# Altium PCB MBC PCB.PcbDoc
Units mm, origin at the board's own origin, x right, y up, seen from the top; angles counter-clockwise.
Board outline 68 x 68 mm, 2 copper layers (Top Layer, Bottom Layer); 66 components, 47 nets, 186 pads, 57 vias.
Unrouted connection lines stored in the file: 76.
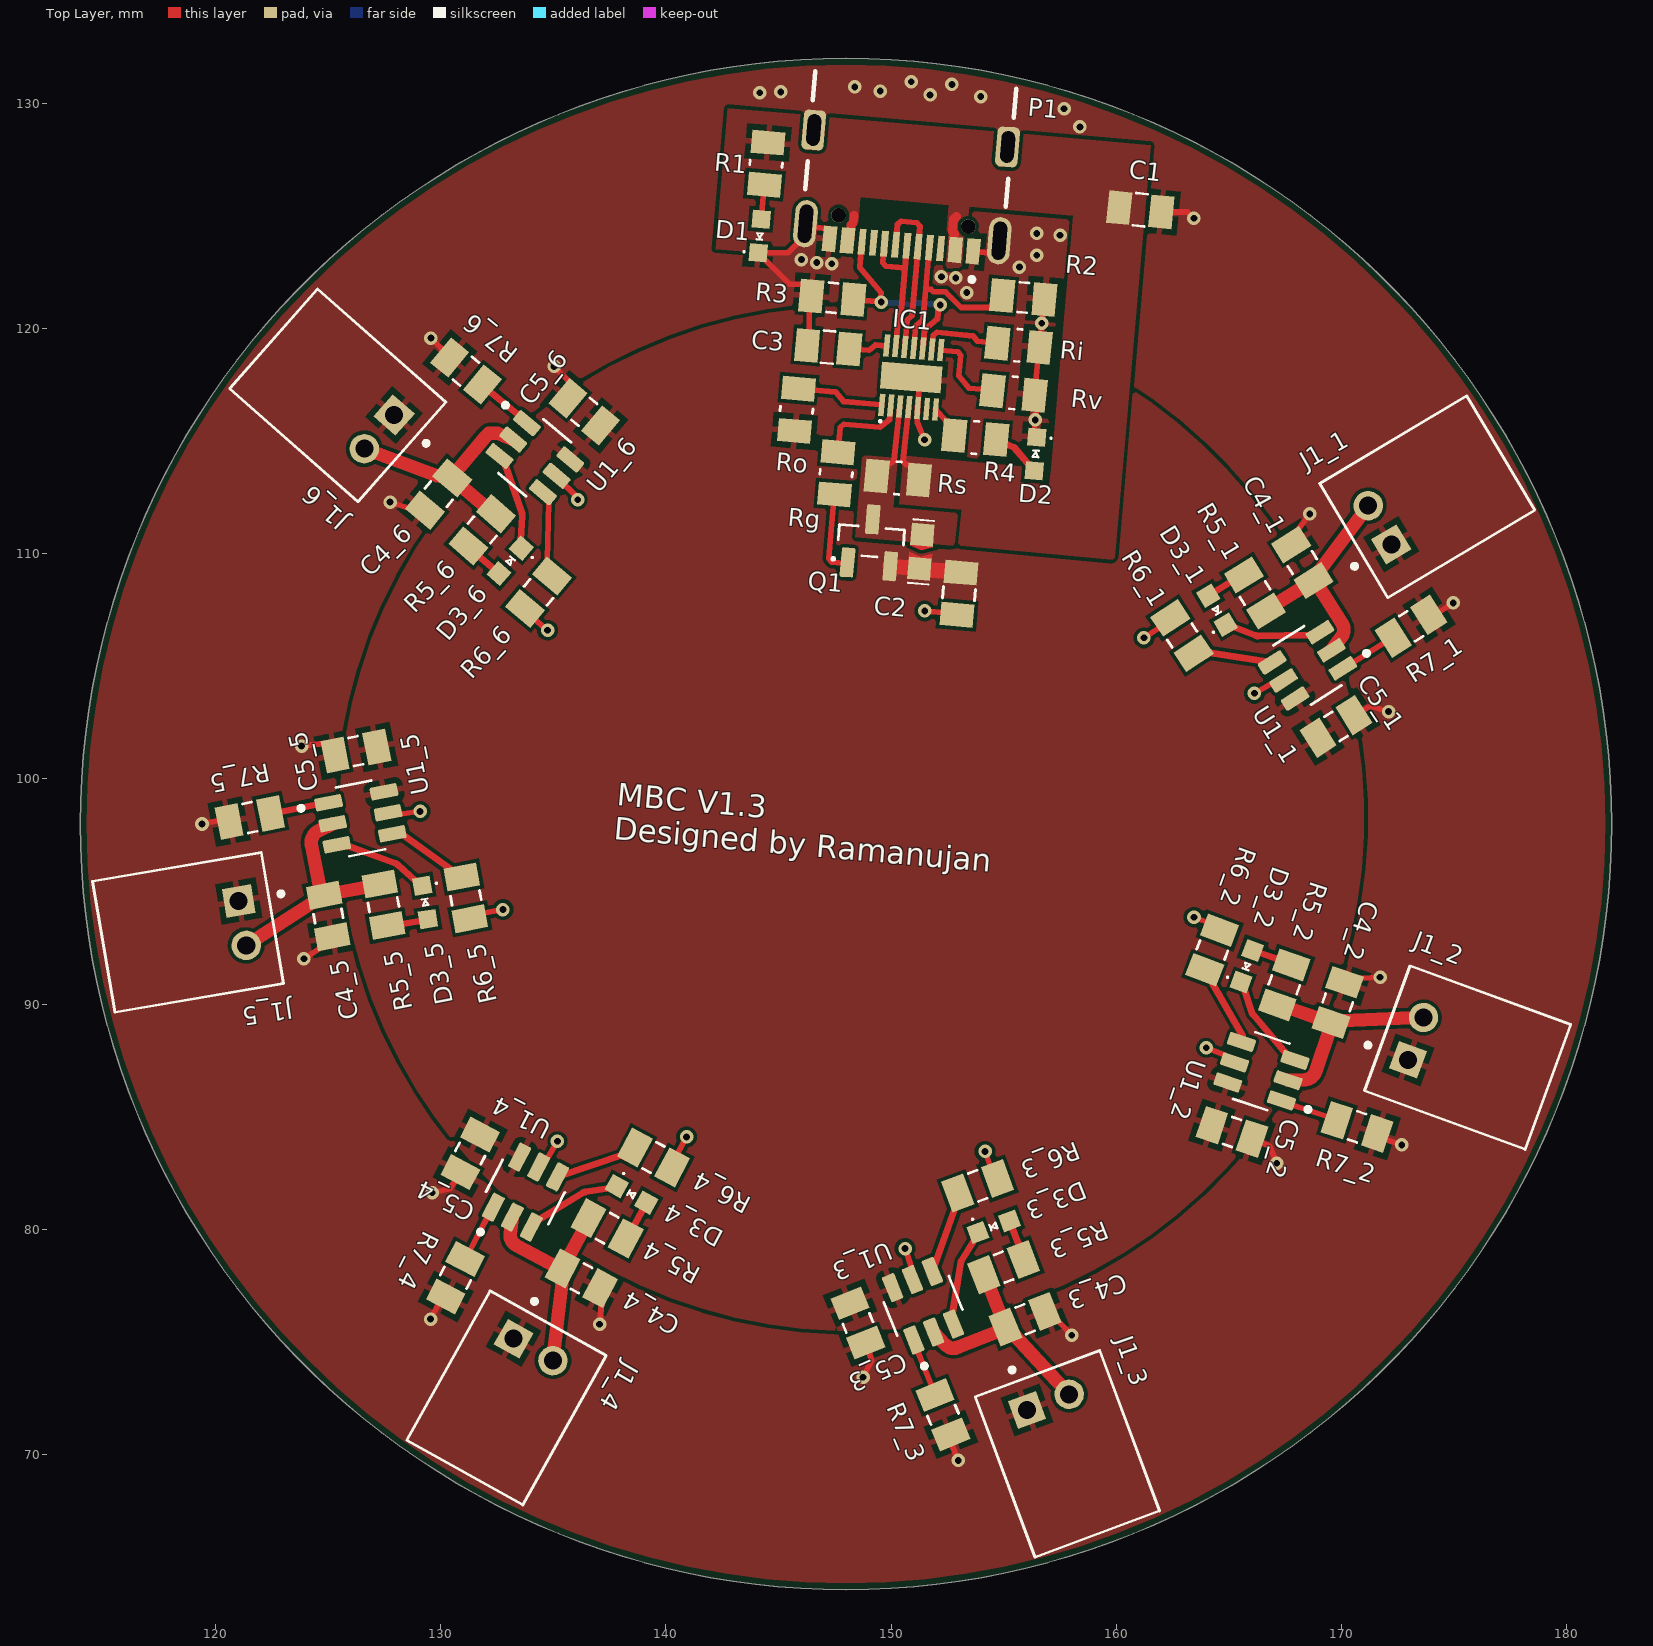
[diagram p0: Top Layer view]
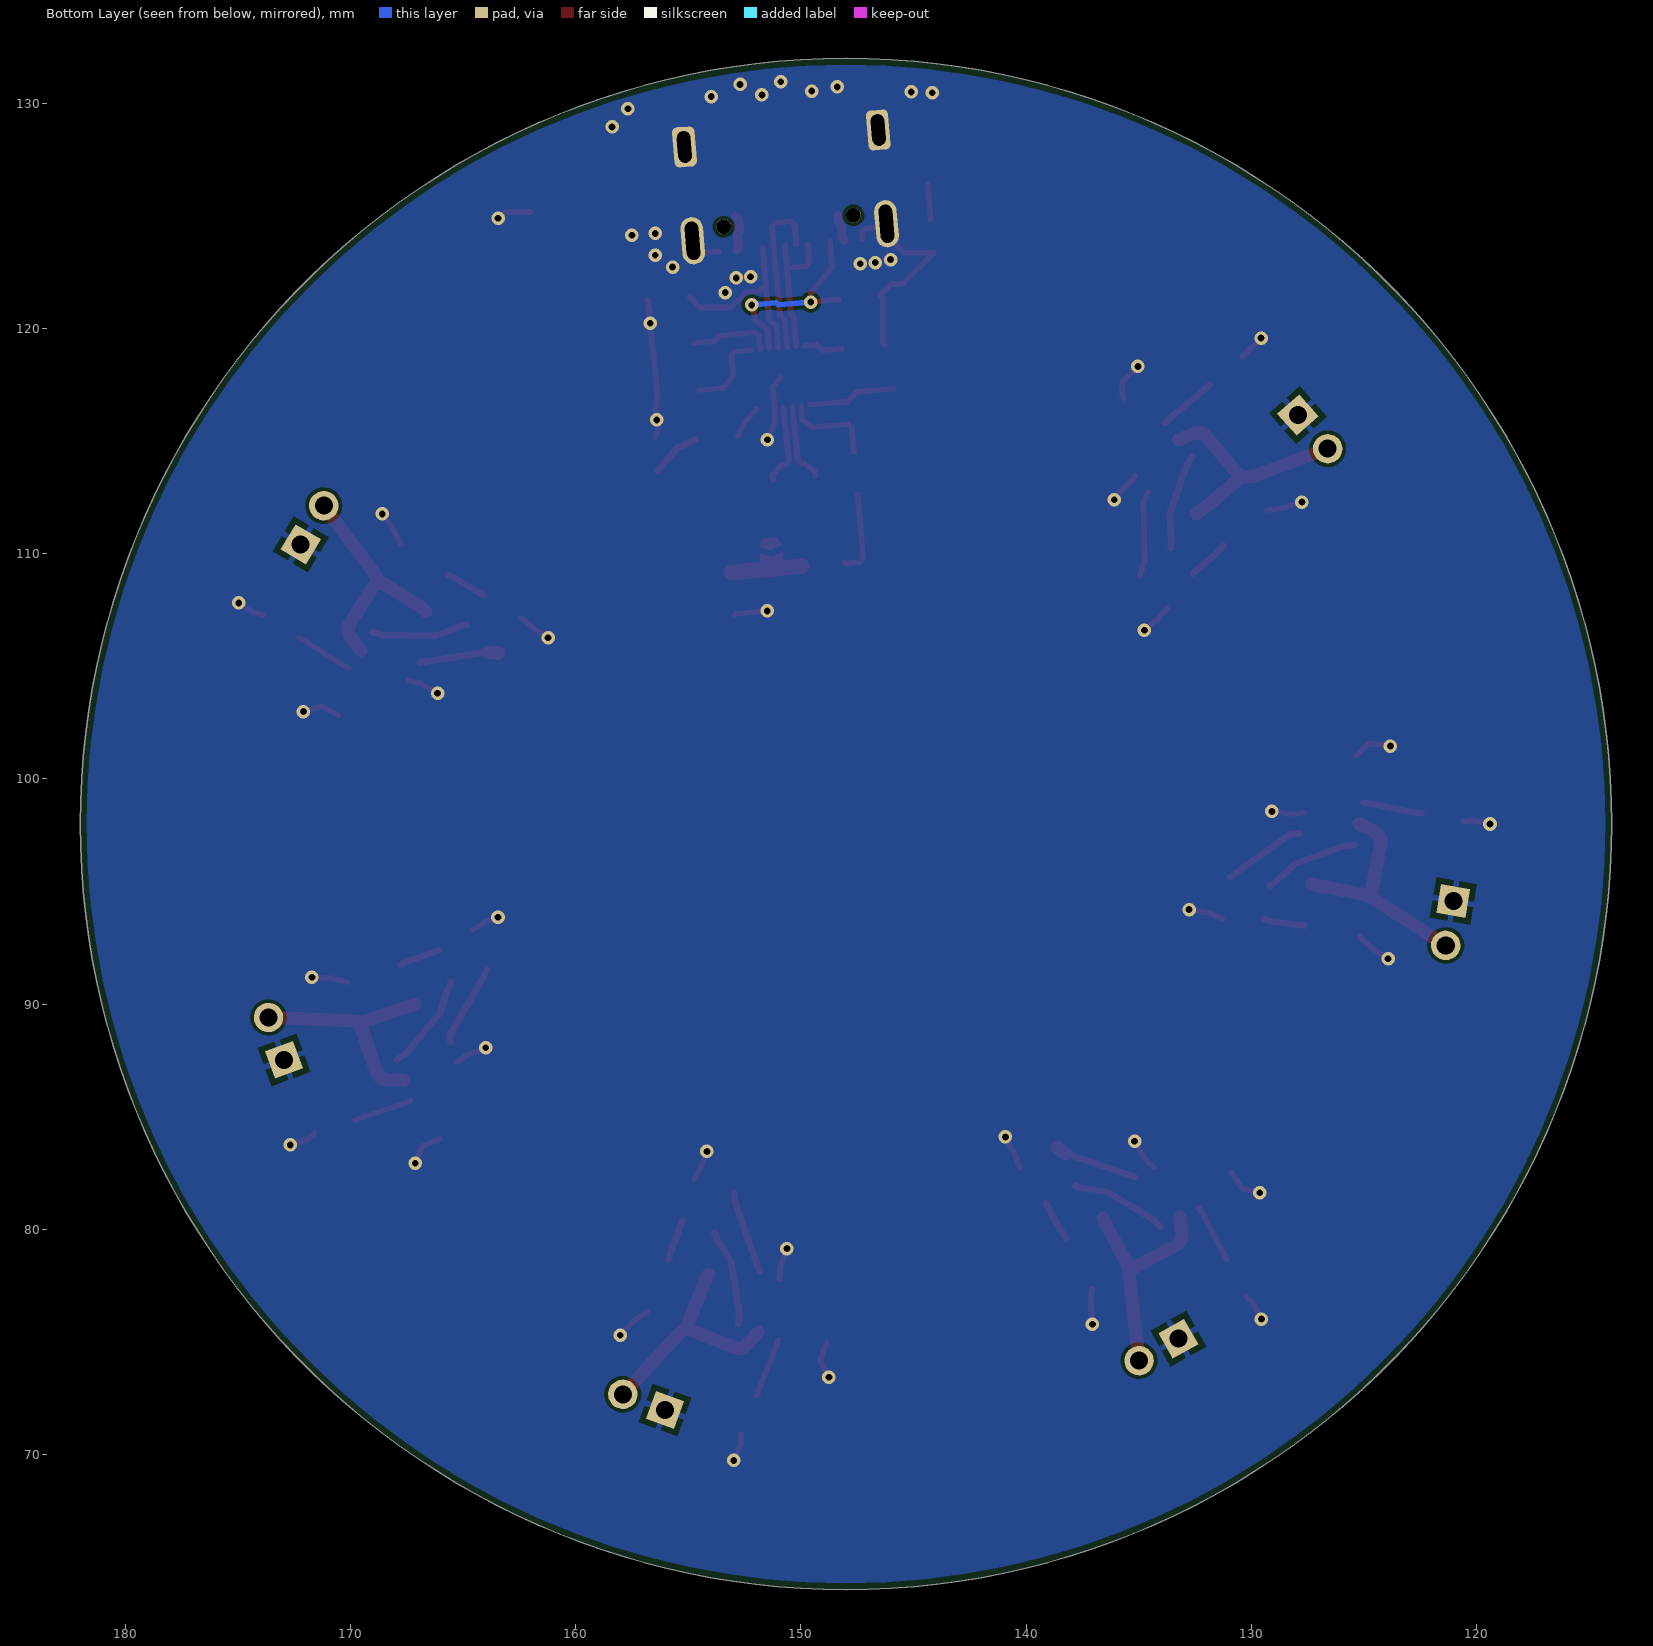
[diagram p1: Bottom Layer view, seen from below]
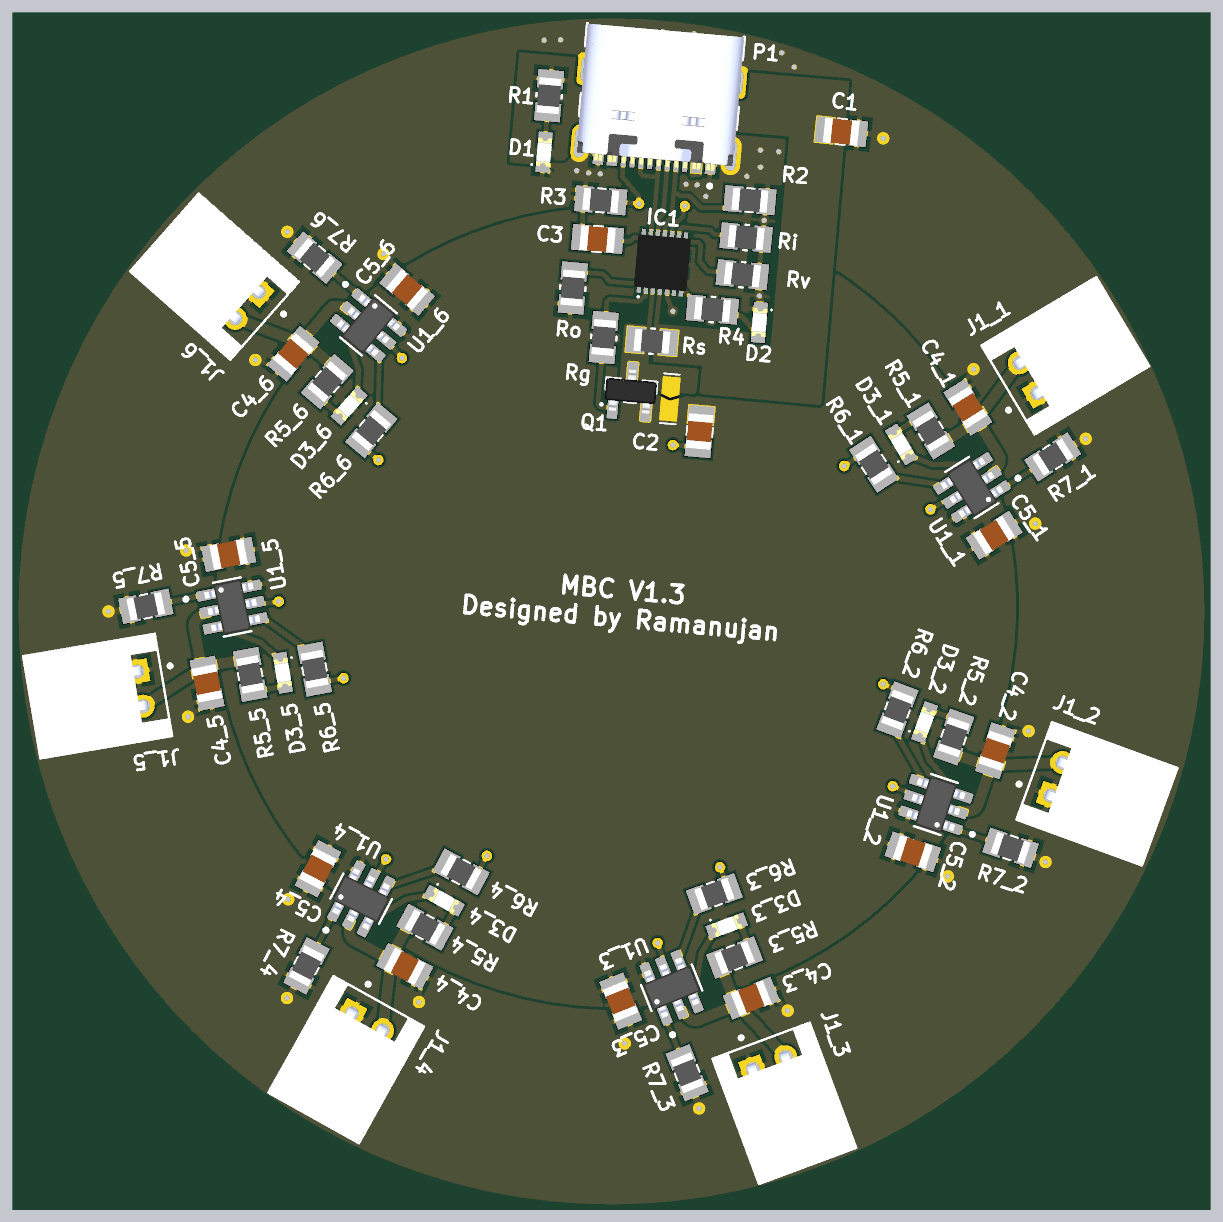
[diagram p2: 3D render of the assembled board from above, using the file's embedded part models]

## Layer stack, top to bottom
Top Solder: solder mask 0.0102, Solder Resist, Dk 3.5
Top Layer: signal copper 0.0356
Dielectric 1: dielectric 0.32, FR-4, Dk 4.8
Bottom Layer: signal copper 0.0356
Bottom Solder: solder mask 0.0102, Solder Resist, Dk 3.5

## Board outline
114,98 ccw(c148,98) 148,64 ccw(c148,98) 182,98 ccw(c148,98) 148,132 ccw(c148,98)

## Design rules (kind name [scope] priority, off if disabled: settings)
BoardOutlineClearance [All] p1: gap=0 ignorepadtopadclearanceinfootprint=FALSE
Clearance [All] p1: gap=0.152 ignorepadtopadclearanceinfootprint=FALSE except(0.127: Arc-Arc Arc-Track Arc-SMDPad Track-Track Track-SMDPad)
HoleSize [All] p1: absolutevalues=TRUE maxlimit=6.2 minlimit=0.3 maxpercent=80.000 minpercent=20.000
MinimumAnnularRing [All] p1: minimumring=0.15
MinimumSolderMaskSliver [All] p1: minsoldermaskwidth=0.1
PolygonConnect ViaConnect [IsVia] p1: connectstyle=Direct reliefconductorwidth=0.254 reliefentries=4 polygonreliefangle="90 Angle" airgapwidth=0.254
PolygonConnect [All] p2: connectstyle=Relief reliefconductorwidth=0.254 reliefentries=4 polygonreliefangle="90 Angle" airgapwidth=0.254
RoomDefinition 1 [InComponentClass('1')] p1: confinementstyle=ConfineIn formatcopy=TRUE lockcomponents=FALSE outline 160.777,107.336 167.902,113.062 175.749,117.735 179.309,111.757 172.116,102.324 168.754,100.205 162.957,104.013
RoomDefinition 2 [InComponentClass('2')] p2: confinementstyle=ConfineIn formatcopy=TRUE lockcomponents=FALSE outline 162.381,90.986 163.783,94.705 172.286,92.543 180.865,89.41 178.478,82.874 166.621,82.494 162.855,83.763
RoomDefinition 6 [InComponentClass('6')] p3: confinementstyle=ConfineIn formatcopy=TRUE lockcomponents=FALSE outline 119.884,117.29 124.487,122.509 135.668,118.545 138.714,115.992 136.584,109.011 134.042,105.956 126.734,111.249
RoomDefinition 5 [InComponentClass('5')] p4: confinementstyle=ConfineIn formatcopy=TRUE lockcomponents=FALSE outline 113.931,95.888 124.041,102.094 127.941,102.859 131.981,96.907 132.73,93.005 124.101,90.559 115.098,89.028
RoomDefinition 3 [InComponentClass('3')] p5: confinementstyle=ConfineIn formatcopy=TRUE lockcomponents=FALSE outline 146.615,77.219 151.549,82.432 155.28,83.8 159.416,75.744 162.601,67.185 156.08,64.758 148.095,73.531
RoomDefinition 4 [InComponentClass('4')] p6: confinementstyle=ConfineIn formatcopy=TRUE lockcomponents=FALSE outline 127.771,70.429 129.27,82.197 131.118,85.715 138.294,85.241 141.797,83.366 138.297,75.015 133.847,67.039
RoutingVias [All] p1: holewidth=0.3 width=0.6 viastyle="Through Hole" minholewidth=0.3 minwidth=0.5 maxholewidth=1 maxwidth=5
SilkToSilkClearance [All] p1: silktosilkclearance=0.1
SilkToSolderMaskClearance [IsPad] p1: minsilkscreentomaskgap=0.1 clearancetoexposedcopper=TRUE
SolderMaskExpansion [All] p1: expansion=0.051 istentingtop=FALSE
SupplyNets "Schematic Supply Nets" [InNet('GND')] p1: voltage=0.000
Width [All] p1: maxlimit=25.4 minlimit=0.15 preferedwidth=0.3
26 further rules are at their usual default settings.

## Classes and differential pairs
channel class Charger: 1 2 3 4 5 6
component class 6: C4_6 C5_6 D3_6 J1_6 R5_6 R6_6 R7_6 U1_6
component class 5: C4_5 C5_5 D3_5 J1_5 R5_5 R6_5 R7_5 U1_5
component class 4: C4_4 C5_4 D3_4 J1_4 R5_4 R6_4 R7_4 U1_4
component class 3: C4_3 C5_3 D3_3 J1_3 R5_3 R6_3 R7_3 U1_3
component class 2: C4_2 C5_2 D3_2 J1_2 R5_2 R6_2 R7_2 U1_2
component class 1: C4_1 C5_1 D3_1 J1_1 R5_1 R6_1 R7_1 U1_1
component class Main: C1 C2 C3 D1 D2 IC1 P1 Q1 R1 R2 R3 R4 Rg Ri Ro Rs Rv

## Components (designator, comment, footprint, x,y, rotation, side; value= is the part's Value field where it differs from the comment)
C1 "10uF" CAPACITOR_0805_2012M-70N 161.069,125.279 r174 top
C2 "10uF" CAPACITOR_0805_2012M-70N 153.018,108.23 r85 top
C3 "1uF" CAPACITOR_0805_2012M-70N 147.21,119.178 r355 top
C4_1 "2.2uF" CAPACITOR_0805_2012M-70N 168.266,109.607 r302.07 top (schematic designator C4)
C4_2 "2.2uF" CAPACITOR_0805_2012M-70N 169.837,90.078 r251.23 top (schematic designator C4)
C4_3 "2.2uF" CAPACITOR_0805_2012M-70N 155.951,76.008 r201.7 top (schematic designator C4)
C4_4 "2.2uF" CAPACITOR_0805_2012M-70N 136.25,77.823 r152.13 top (schematic designator C4)
C4_5 "2.2uF" CAPACITOR_0805_2012M-70N 125.007,93.914 r100.94 top (schematic designator C4)
C4_6 "2.2uF" CAPACITOR_0805_2012M-70N 129.912,112.653 r49.88 top (schematic designator C4)
C5_1 "2.2uF" CAPACITOR_0805_2012M-70N 169.762,102.332 r212.22 top (schematic designator C5)
C5_2 "2.2uF" CAPACITOR_0805_2012M-70N 165.141,84.324 r161.39 top (schematic designator C5)
C5_3 "2.2uF" CAPACITOR_0805_2012M-70N 148.526,75.845 r111.86 top (schematic designator C5)
C5_4 "2.2uF" CAPACITOR_0805_2012M-70N 131.312,83.37 r62.29 top (schematic designator C5)
C5_5 "2.2uF" CAPACITOR_0805_2012M-70N 126.234,101.238 r11.09 top (schematic designator C5)
C5_6 "2.2uF" CAPACITOR_0805_2012M-70N 136.381,116.302 r320.03 top (schematic designator C5)
D1 "LTST-C190 Series" LED_0603_1608M_0.80mm 144.168,124.112 r85 top
D2 "LTST-C190 Series" LED_0603_1608M_0.80mm 156.412,114.43 r265.43 top
D3_1 "LTST-C190 Series" LED_0603_1608M_0.80mm 164.472,107.495 r120.65 top (schematic designator D3)
D3_2 "LTST-C190 Series" LED_0603_1608M_0.80mm 165.803,91.686 r69.81 top (schematic designator D3)
D3_3 "LTST-C190 Series" LED_0603_1608M_0.80mm 154.556,80.12 r20.28 top (schematic designator D3)
D3_4 "LTST-C190 Series" LED_0603_1608M_0.80mm 138.476,81.552 r330.71 top (schematic designator D3)
D3_5 "LTST-C190 Series" LED_0603_1608M_0.80mm 129.308,94.516 r279.52 top (schematic designator D3)
D3_6 "LTST-C190 Series" LED_0603_1608M_0.80mm 133.083,109.686 r228.46 top (schematic designator D3)
IC1 "AP33771CFBZ-13-FA01" AP33771CFBZ13FA01 150.896,117.829 r355 top
J1_1 "S2B-PH-K-S(LF)(SN)" JST_S2B-PH-K-S(LF)(SN) 171.704,111.277 r120.78 top (schematic designator J1)
J1_2 "S2B-PH-K-S(LF)(SN)" JST_S2B-PH-K-S(LF)(SN) 173.304,88.467 r69.94 top (schematic designator J1)
J1_3 "S2B-PH-K-S(LF)(SN)" JST_S2B-PH-K-S(LF)(SN) 156.976,72.325 r20.41 top (schematic designator J1)
J1_4 "S2B-PH-K-S(LF)(SN)" JST_S2B-PH-K-S(LF)(SN) 134.112,74.654 r330.84 top (schematic designator J1)
J1_5 "S2B-PH-K-S(LF)(SN)" JST_S2B-PH-K-S(LF)(SN) 121.198,93.594 r279.65 top (schematic designator J1)
J1_6 "S2B-PH-K-S(LF)(SN)" JST_S2B-PH-K-S(LF)(SN) 127.27,115.415 r228.59 top (schematic designator J1)
P1 "USB4105-GF-A" GCT_USB4105-GF-A 150.871,128.444 r175 top
Q1 "AS2312" SOT23-3N-1.15mm 149.103,110.53 r85 top
R1 "100k" Resistor_0805_2012M-50N 144.453,127.325 r85 top
R2 "5.1k" Resistor_0805_2012M-50N 155.875,121.381 r175 top
R3 "5.1k" Resistor_0805_2012M-50N 147.391,121.371 r355 top
R4 "1k" Resistor_0805_2012M-50N 153.739,115.162 r174.81 top
R5_1 "1.5k" Resistor_0805_2012M-50N 166.162,108.256 r301.49 top (schematic designator R5)
R5_2 "1.5k" Resistor_0805_2012M-50N 167.461,90.856 r250.66 top (schematic designator R5)
R5_3 "1.5k" Resistor_0805_2012M-50N 155.001,78.32 r201.13 top (schematic designator R5)
R5_4 "1.5k" Resistor_0805_2012M-50N 137.394,80.046 r151.56 top (schematic designator R5)
R5_5 "1.5k" Resistor_0805_2012M-50N 127.456,94.415 r100.37 top (schematic designator R5)
R5_6 "1.5k" Resistor_0805_2012M-50N 131.842,111.063 r49.3 top (schematic designator R5)
R6_1 "560" Resistor_0805_2012M-50N 162.922,106.367 r303.26 top (schematic designator R6)
R6_2 "560" Resistor_0805_2012M-50N 164.263,92.4 r249.34 top (schematic designator R6)
R6_3 "560" Resistor_0805_2012M-50N 153.849,81.931 r200.14 top (schematic designator R6)
R6_4 "560" Resistor_0805_2012M-50N 139.45,83.191 r151.85 top (schematic designator R6)
R6_5 "560" Resistor_0805_2012M-50N 131.116,94.718 r100.86 top (schematic designator R6)
R6_6 "560" Resistor_0805_2012M-50N 134.343,108.291 r50.24 top (schematic designator R6)
R7_1 "10k" Resistor_0805_2012M-50N 173.093,106.783 r212.52 top (schematic designator R7)
R7_2 "10k" Resistor_0805_2012M-50N 170.696,84.552 r161.68 top (schematic designator R7)
R7_3 "10k" Resistor_0805_2012M-50N 152.305,71.767 r112.16 top (schematic designator R7)
R7_4 "10k" Resistor_0805_2012M-50N 130.658,77.849 r62.59 top (schematic designator R7)
R7_5 "10k" Resistor_0805_2012M-50N 121.522,98.288 r11.39 top (schematic designator R7)
R7_6 "10k" Resistor_0805_2012M-50N 131.124,118.112 r320.33 top (schematic designator R7)
Rg "6.2k" Resistor_0805_2012M-50N 147.563,113.576 r265 top
Ri "5.1k" Resistor_0805_2012M-50N 155.659,119.258 r174.34 top (schematic designator Risel)
Ro "200" Resistor_0805_2012M-50N 145.801,116.39 r265 top
Rs "5mOhm" Resistor_0805_2012M-50N 150.305,113.363 r175 top
Rv "100k" Resistor_0805_2012M-50N 155.443,117.146 r173.89 top (schematic designator Rvsel)
SB1 "Solder Jumper Normally Open" "Solder bridge Chevron 0603 Open" 151.323,110.085 r265 top
U1_1 "BQ21040DBVR" SOT95P280X145-6N 168.497,105.045 r212.36 top (schematic designator U1)
U1_2 "BQ21040DBVR" SOT95P280X145-6N 166.446,87.018 r161.52 top (schematic designator U1)
U1_3 "BQ21040DBVR" SOT95P280X145-6N 151.422,76.601 r111.99 top (schematic designator U1)
U1_4 "BQ21040DBVR" SOT95P280X145-6N 133.765,81.655 r62.42 top (schematic designator U1)
U1_5 "BQ21040DBVR" SOT95P280X145-6N 126.436,98.252 r11.23 top (schematic designator U1)
U1_6 "BQ21040DBVR" SOT95P280X145-6N 134.184,114.268 r320.17 top (schematic designator U1)

## Footprints (in the part's own frame and the unit in brackets; to place one, negate y for a bottom-side part, rotate by r counter-clockwise, add the part's x,y. Pads: shape width x height; smd on the part's side, far side on the other; paste and mask are expansions set on the pad)
AP33771CFBZ13FA01 [mm]
  rect 0.24x1 smd mask+0.029: 1(-1.2,-1.325) 2(-0.8,-1.325) 3(-0.4,-1.325) 4(0,-1.325) 5(0.4,-1.325) 6(0.8,-1.325) 7(1.2,-1.325) 8(1.2,1.325) 9(0.8,1.325) 10(0.4,1.325) 11(0,1.325) 12(-0.4,1.325) 13(-0.8,1.325) 14(-1.2,1.325)
  rect 2.7x1.2 smd: 15(0,0)
  silkscreen extent -1.25,-2.1 -1.15,-2, body extent -1.5,-1.5 1.5,1.5, height 0.75
CAPACITOR_0805_2012M-70N [mm] "Capacitor, 0805 (2012 metric), 0.7mm high, nominal pads,"
  rect 1.04x1.47 smd mask+0.051: 1(-0.94,0) 2(0.94,0)
  silkscreen extent -0.25,-0.72 0.25,0.72, body extent -1,-0.73 1,0.73, height 1.23
GCT_USB4105-GF-A [mm]
  rect 0.6x1.15 smd mask+0.049: A1_B12(-3.2,4.755) A4_B9(-2.4,4.755) B1_A12(3.2,4.755) B4_A9(2.4,4.755)
  rect 0.3x1.15 smd mask+0.049: A5(-1.25,4.755) A6(-0.25,4.755) A7(0.25,4.755) A8(1.25,4.755) B5(1.75,4.755) B6(0.75,4.755) B7(-0.75,4.755) B8(-1.75,4.755)
  oval 1x2.1 hole 0.6 slot 1.7 at 90 deg: SH1(-4.32,4.18) SH2(4.32,4.18)
  rrect50% 1x1.8 hole 0.6 slot 1.4 at 90 deg: SH3(-4.32,0) SH4(4.32,0)
  round 0.65 hole 0.65 unplated mask+0.051: ""(-2.89,3.68) ""(2.89,3.68)
  silkscreen extent -4.47,-2.6 4.47,6.1, body extent -4.47,-2.6 4.47,5.11, height 3.31
JST_S2B-PH-K-S(LF)(SN) [mm]
  rect 1.308x1.308 / inner round 1.308 / far side rect 1.308x1.308 hole 0.8: 1(-1,0)
  round 1.308 hole 0.8: 2(1,0)
  silkscreen extent -2.95,-6.25 2.95,2, body extent -2.98,-6.21 2.92,1.39, height 4.8
LED_0603_1608M_0.80mm [mm] "LED, 0603 (1608 metric), 0.8mm high"
  rect 0.8x0.8 smd mask+0.051: A(0.75,0) C(-0.75,0)
  silkscreen extent -0.79,-0.12 0.13,0.66, body extent -0.8,-0.4 0.8,0.4, height 0.8
Resistor_0805_2012M-50N [mm] "Resistor, 0805 (2012 metric), nominal pads"
  rect 1.04x1.47 smd mask+0.051: 1(-0.94,0) 2(0.94,0)
  silkscreen extent -0.1,-0.72 0.1,0.72, body extent -1,-0.63 1,0.62, height 0.5
"Solder bridge Chevron 0603 Open" [mm] "Solder bridge for robust, easy to access bridges that are likely to be soldered and unsoldered often. Open."
  rect 1x1.02 smd paste-2539.97 mask+0: 1(-0.759,0) 2(0.759,0)
  Top Layer region: 0.677,-0.51 0.677,0 0.227,0 0.033,-0.51
  Top Layer region: 0.677,0.51 0.677,0 0.227,0 0.033,0.51
  Top Layer region: -0.631,-0.296 -0.631,0.304 -0.26,0.51 -0.065,0.004 -0.26,-0.506
  silkscreen extent -1.41,-0.45 1.41,0.45
SOT23-3N-1.15mm [mm] "SOT23, 3-pin, 1.15mm high, nominal pads"
  rrect25% 1.32x0.6 smd mask+0.051: 1(-1,0.95) 2(-1,-0.95) 3(1,0)
  silkscreen extent -0.93,-1.45 0.65,1.63, body extent -1.19,-1.45 1.21,1.45, height 0.91
SOT95P280X145-6N [mm]
  rrect25% 1.21x0.58 smd: 1(-1.255,0.95) 2(-1.255,0) 3(-1.255,-0.95) 4(1.255,-0.95) 5(1.255,0) 6(1.255,0.95)
  silkscreen extent -2.6,-1.56 0.8,1.56, body extent -1.4,-1.45 1.4,1.45, height 1.45

## Part data
C1 C2 C3: library part GRM21BR60J107ME15L, "Passive - Capacitor, 0805, 100uF Max, X5R, 6.3V ±20%, -55°C ~ 85°C, 0805 (2012 Metric). 20uF @ 6.3V", Capacitance at Rated Voltage=20%, Package=0805, Rated Voltage=6.3V, Supplier 1 Part No.=490-GRM155R61E225KE11JCT-ND, Temp Range="-55°C ~ 85°C", Temperature Coefficient=X5R, Tolerance=±20%, APSS Standard Part="APSS Standard", MF Part No.=GRM21BR60J107ME15L, Supplier 1=Digikey
C4_1 C4_2 C4_3 C4_4 C4_5 C4_6 C5_1 C5_2 C5_3 C5_4 C5_5 C5_6: library part C0805C225K8PACTU, "Passive - Capacitor, X5R, 2.2uF Max, 10V, 0805 (2012 Metric), ±10%, -55°C ~ 85°C. 2uF @ 5V, 1.1uF @ 10V", Capacitance at Rated Voltage=50%, Package=0805, Rated Voltage=10V, Supplier 1 Part No.=399-C0805C225K8PACTUCT-ND, Temp Range="-55°C ~ 85°C", Temperature Coefficient=X5R, Tolerance=±10%, APSS Standard Part="APSS Standard", MF Part No.=C0805C225K8PACTU, Supplier 1=Digikey
D1 D2 D3_1 D3_2 D3_3 D3_4 D3_5 D3_6: "Diode - LED, 0603", Package=0603, Rated Voltage="5V Reverse", Temp Range="-30°C ~ 85°C", APSS Standard Part="APSS Standard", Supplier 1=Digikey
IC1: "Integrated Circuit", Manufacturer_Name="Diodes Incorporated", Mouser Part Number=621-P33771CFBZ13FA01, Arrow Part Number=AP33771CFBZ-13-FA01, Arrow Price/Stock=https://www.arrow.com/en/products/ap33771cfbz-13-fa01/diodes-incorporated?utm_currency=USD&region=nac, Datasheet Link=https://www.diodes.com/datasheet/download/AP33771C.pdf, Height=0.8mm, Manufacturer_Part_Number=AP33771CFBZ-13-FA01, Mouser Price/Stock=https://www.mouser.co.uk/ProductDetail/Diodes-Incorporated/AP33771CFBZ-13-FA01?qs=2wMNvWM5ZX7JpCFGcPz6nw%3D%3D
J1_1 J1_2 J1_3 J1_4 J1_5 J1_6: "Connector Header Through Hole, Right Angle 2 position", Package=None, Availability="In Stock", Check_prices=https://www.snapeda.com/parts/S2B-PH-K-S(LF)(SN)/JST+Sales+America+Inc./view-part/?ref=eda, MF="JST Sales America Inc.", MP=S2B-PH-K-S(LF)(SN), Price=None, Purchase-URL=https://pricing.snapeda.com/search/part/S2B-PH-K-S(LF)(SN)/?ref=eda, SnapEDA_Link=https://www.snapeda.com/parts/S2B-PH-K-S(LF)(SN)/JST+Sales+America+Inc./view-part/?ref=snap
P1: "USB-C (USB TYPE-C) USB 2.0 Receptacle Connector 24 (16+8 Dummy) Position Surface Mount, Right Angle; Through Hole", Supplier 1 Part No.=2073-USB4105-GF-ACT-ND, MF Part No.=USB4105-GF-A, Supplier 1=Digikey
Q1: "Transistor - MOSFET, N-Channel AS2312", Package=SOT-23-3, Power=1.2W, Rated Voltage="20 Vds", Supplier 1 Part No.=4530-AS2312CT-ND, Temp Range="0°C ~ 150°C (TJ)", APSS Standard Part="APSS Standard", MF Part No.=AS2312, Supplier 1=Digikey
R1 R2 R3 R4 R5_1 R5_2 R5_3 R5_4 R5_5 R5_6 R6_1 R6_2 R6_3 R6_4 R6_5 R6_6 R7_1 R7_2 R7_3 R7_4 R7_5 R7_6 Rg Ri Ro Rs Rv: library part "RMCF0805JT Series", "Passive - Resistor Series, 0805, 5%, 100m - 22M, E24, 0.063W, 1/16W, ±200ppm/°C, -55°C ~ 155°C, 0805 (2012 Metric)", Package=0805, Power=1/8W, Rated Voltage=150V, Temp Range="-55°C ~ 155°C", Temperature Coefficient=±200ppm/°C, Tolerance=5%, Value Range="100m ~ 22M", APSS Standard Part="APSS Standard", E Series=E24, Supplier 1=Digikey
U1_1 U1_2 U1_3 U1_4 U1_5 U1_6: "1-cell, 0.8-A Li-ion and Li-polymer battery charger", Package=SOT23-6, Supplier 1 Part No.=296-47315-1-ND, MF="Texas Instruments", MF Part No.=BQ21040DBVR, Supplier 1=Digikey
SB1: DEBUG=DEBUG

## Via types
v1: diameter 0.6, hole 0.3, Top Layer to Bottom Layer, 34 vias
v2: diameter 0.6, hole 0.3, Top Layer to Bottom Layer, tented both sides, 23 vias

## Nets (pads, with @x,y where several pads share a name; then routed paths per layer and width w, separated by ;. In a path a pad name is that pad's centre, name@x,y a point inside that pad or via, vN(x,y) a via of type N, cw(c..) or ccw(c..) an arc to the next point about the centre after c; other vN are vias at no path point)
CC1: IC1.11 P1.A5 R2.2 | length 8.6
  Top Layer w0.254: IC1.11 151.096,120.117 151.421,120.39 151.541,121.76 ; P1.A5 151.541,121.76 ; R2.2 154.938,121.396 154.483,120.94 153.113,120.94 152.422,121.631 151.888,121.631 151.78,121.74 151.688,121.748 151.541,121.76
CC2: IC1.10 P1.B5 R3.2 | length 9.2
  Top Layer w0.254: R3.2 v1(149.568,121.18) 149.527,121.229 149.559,121.593 148.614,122.719 P1.B5 ; IC1.10 151.418,119.12 151.49,119.95 152.061,120.429 152.11,120.992 v1(152.182,121.052)
  Bottom Layer w0.254: v1(149.568,121.18) 150.995,121.055 151.103,121.146 v1(152.182,121.052)
DN: IC1.12 P1.A7 P1.B7 | length 7.5
  Top Layer w0.254: P1.A7 150.287,124.632 150.448,124.767 151.148,124.706 151.283,124.545 P1.B7 150.935,120.57 150.718,120.388 IC1.12
DP: IC1.13 P1.A6 P1.B6 | length 6.4
  Top Layer w0.254: P1.B6 149.636,122.931 149.772,122.768 150.619,122.694 ; IC1.13 150.332,120.561 150.44,120.652 150.619,122.694 ; P1.A6 150.619,122.694
GND: C1.1 C2.1 C3.1 C4_1.1 C4_2.1 C4_3.1 C4_4.1 C4_5.1 C4_6.1 C5_1.1 C5_2.1 C5_3.1 C5_4.1 C5_5.1 C5_6.1 D1.C D2.C IC1.5 IC1.15 J1_1.1 J1_2.1 J1_3.1 J1_4.1 J1_5.1 J1_6.1 P1.A1_B12 P1.B1_A12 P1.SH1 P1.SH2 P1.SH3 P1.SH4 R2.1 R3.1 R6_1.1 R6_2.1 R6_3.1 R6_4.1 R6_5.1 R6_6.1 R7_1.1 R7_2.1 R7_3.1 R7_4.1 R7_5.1 R7_6.1 Ri.1 Rv.1 U1_1.5 U1_2.5 U1_3.5 U1_4.5 U1_5.5 U1_6.5 | length 67.8
  Top Layer w0.254: v1(119.4,98) 120.189,98.159 R7_5.1 ; v1(123.819,101.463) 124.809,101.578 C5_5.1 ; v1(123.924,92.011) 124.663,92.49 C4_5.1 ; U1_5.5 128.168,98.429 v1(129.083,98.561) ; v1(127.752,112.299) 128.588,112.025 C4_6.1 ; v1(129.552,76.015) 129.922,76.729 R7_4.1 ; v1(129.567,119.582) 130.401,118.753 R7_6.1 ; v1(129.623,81.628) 130.417,81.809 C5_4.1 ; R6_5.1 131.867,94.029 v1(132.766,94.202) ; R6_6.1 134.148,107.105 v1(134.749,106.605) ; U1_4.5 134.712,83.116 v1(135.183,83.911) ; v1(135.037,118.321) 135.037,118.319 135.735,117.624 135.737,116.983 C5_6.1 ; U1_6.5 135.148,113.42 136.088,112.485 v1(136.088,112.403) ; v1(137.054,75.787) 137.144,76.662 C4_4.1 ; R6_4.1 140.5,83.319 v1(140.918,84.1) ; C3.1 146.364,119.351 146.364,121.362 R3.1 146.455,121.521 146,121.976 145.492,121.976 D1.C 145.411,123.365 146.203,124.157 P1.SH2 146.319,124.519 147.136,124.448 147.293,124.26 P1.B1_A12 ; v1(148.757,73.431) 149.134,74.153 C5_3.1 ; v1(150.624,79.144) 150.925,78.269 U1_3.5 ; IC1.15 151.26,117.395 IC1.5 151.16,115.963 151.16,115.861 151.169,115.838 v2(151.489,115.065) ; v1(151.495,107.46) 152.899,107.337 C2.1 ; R7_3.1 152.68,70.481 v1(152.984,69.736) ; P1.A1_B12 154.417,123.361 154.79,123.674 P1.SH1 ; v1(154.174,83.456) 154.419,82.788 R6_3.1 ; D2.C 156.357,115.46 156.461,116.425 Rv.1 156.428,117.652 156.518,118.562 Ri.1 156.647,119.771 156.728,120.696 R2.1 ; C4_3.1 157.414,75.936 v1(158.022,75.299) ; v1(161.23,106.267) 161.951,106.74 R6_1.1 ; C1.1 163.171,125.18 v1(163.453,124.898) ; v1(163.455,93.859) 164.075,93.625 R6_2.1 ; v1(163.994,88.062) 164.854,87.722 U1_2.5 ; C5_2.1 166.823,83.688 v1(167.127,82.933) ; v1(166.139,103.803) 166.946,104.255 U1_1.5 ; C4_1.1 168.074,111.059 v1(168.59,111.771) ; C4_2.1 170.842,91.145 v1(171.72,91.194) ; C5_1.1 171.317,103.234 v1(172.095,102.993) ; R7_2.1 171.918,84.003 v1(172.682,83.75) ; R7_1.1 174.291,107.384 v1(174.969,107.816)
  other v2: 156.409,115.943 156.688,120.234 153.364,121.602 152.871,122.251 152.24,122.299 155.701,122.735 147.363,122.881 146.7,122.935 146.019,123.064 156.474,123.253 157.507,124.142 156.476,124.227 158.387,128.955 157.684,129.76 153.979,130.303 151.732,130.376 144.17,130.478 145.105,130.508 149.522,130.549 148.388,130.732 152.703,130.845 150.893,130.966
ISEL: IC1.9 Ri.2 | length 3.7
  Top Layer w0.254: IC1.9 151.875,119.71 152.04,119.844 153.642,119.676 153.829,119.445 Ri.2
ISET_1: R6_1.2 U1_1.4 | length 3.5
  Top Layer w0.3: R6_1.2@163.922,105.635 U1_1.4
  Top Layer w0.6: R6_1.2 R6_1.2@163.922,105.635
ISET_2: R6_2.2 U1_2.4 | length 3.7
  Top Layer w0.3: R6_2.2 164.167,91.108 165.623,88.561 U1_2.4
ISET_3: R6_3.2 U1_3.4 | length 3.7
  Top Layer w0.3: U1_3.4 152.909,81.124 R6_3.2
ISET_4: R6_4.2 U1_4.4 | length 3.7
  Top Layer w0.3: U1_4.4 R6_4.2@138.222,83.355
  Top Layer w0.6: R6_4.2@138.222,83.355 R6_4.2
ISET_5: R6_5.2 U1_5.4 | length 3.7
  Top Layer w0.3: U1_5.4 128.306,97.532 R6_5.2
ISET_6: R6_6.2 U1_6.4 | length 3.8
  Top Layer w0.254: U1_6.4@134.579,112.734 134.802,112.303 134.728,109.705 R6_6.2
NetD1_A: D1.A R1.1 | length 1.5
  Top Layer w0.254: D1.A 144.367,126.385 R1.1
NetD2_A: D2.A R4.1 | length 2.2
  Top Layer w0.3: R4.1 155.468,114.72 D2.A
NetD3_1_A: D3_1.A R5_1.1 | length 1.8
  Top Layer w0.3: D3_1.A 164.172,108.196 165.275,108.871 R5_1.1
NetD3_1_C: D3_1.C U1_1.3 | length 4.3
  Top Layer w0.3: D3_1.C 165.196,106.762 166.197,106.369 ccw(c166.298,106.627) 166.304,106.35 168.589,106.394 U1_1.3
NetD3_2_A: D3_2.A R5_2.1 | length 1.8
  Top Layer w0.3: D3_2.A 166.158,92.361 167.378,91.933 R5_2.1
NetD3_2_C: D3_2.C U1_2.3 | length 4.3
  Top Layer w0.3: D3_2.C 165.693,90.662 166.02,89.638 ccw(c166.284,89.722) 166.072,89.543 167.55,87.799 U1_2.3
NetD3_3_A: D3_3.A R5_3.1 | length 1.8
  Top Layer w0.3: D3_3.A 155.3,80.288 155.766,79.082 R5_3.1
NetD3_3_C: D3_3.C U1_3.3 | length 4.3
  Top Layer w0.3: U1_3.3 152.733,76.268 153.1,78.524 cw(c153.374,78.479) 153.138,78.625 153.705,79.539 D3_3.C
NetD3_4_A: D3_4.A R5_4.1 | length 1.8
  Top Layer w0.3: R5_4.1 138.471,79.958 139.087,81.095 D3_4.A
NetD3_4_C: D3_4.C U1_4.3 | length 4.3
  Top Layer w0.3: U1_4.3 134.361,80.441 136.317,81.625 cw(c136.461,81.388) 136.419,81.662 137.482,81.823 D3_4.C
NetD3_5_A: D3_5.A R5_5.1 | length 1.8
  Top Layer w0.3: R5_5.1 128.211,93.544 129.19,93.708 D3_5.A
NetD3_5_C: D3_5.C U1_5.3 | length 4.3
  Top Layer w0.3: U1_5.3 125.864,97.027 128.012,96.244 cw(c127.917,95.984) 128.104,96.188 128.896,95.461 D3_5.C
NetD3_6_A: D3_6.A R5_6.1 | length 1.8
  Top Layer w0.3: R5_6.1 131.644,109.936 132.397,109.288 D3_6.A
NetD3_6_C: D3_6.C U1_6.3 | length 4.3
  Top Layer w0.3: U1_6.3 132.872,113.943 133.613,111.78 cw(c133.351,111.691) 133.627,111.673 133.559,110.6 D3_6.C
NetIC1_7: IC1.7 R4.2 | length 1.4
  Top Layer w0.254: IC1.7 152.467,115.888 R4.2
NetQ1_1: Q1.1 Rg.2 | length 3.8
  Top Layer w0.254: Rg.2 147.231,109.789 147.367,109.628 148.015,109.571 Q1.1
NetR7_1_2: R7_1.2 U1_1.1 | length 2.6
  Top Layer w0.254: U1_1.1 170.487,105.142 171.96,106.081 R7_1.2
NetR7_2_2: R7_2.2 U1_2.1 | length 2.6
  Top Layer w0.254: U1_2.1 167.778,85.537 169.436,84.988 R7_2.2
NetR7_3_2: R7_3.2 U1_3.1 | length 2.6
  Top Layer w0.254: U1_3.1 151.16,74.626 151.818,73.009 R7_3.2
NetR7_4_2: R7_4.2 U1_4.1 | length 2.6
  Top Layer w0.254: R7_4.2@131.091,78.683 131.287,79.024 132.092,80.574 U1_4.1
NetR7_5_2: R7_5.2 U1_5.1 | length 2.6
  Top Layer w0.3: R7_5.2 122.81,98.529 124.567,98.883 U1_5.1
NetR7_6_2: R7_6.2 U1_6.1 | length 2.6
  Top Layer w0.3: R7_6.2 132.122,117.262 133.501,116.118 U1_6.1
PWR_EN: IC1.2 Rg.1 | length 4.1
  Top Layer w0.254: Rg.1 147.741,115.619 147.903,115.755 149.514,115.614 149.929,115.949 IC1.2
V5V: C3.2 IC1.14 | length 1.7
  Top Layer w0.254: C3.2@148.162,119.109 149.023,119.034 149.303,119.269 IC1.14@149.807,119.225
Vbat_1: C4_1.2 J1_1.2 R5_1.2 U1_1.2 | length 10.3
  Top Layer w0.6: R5_1.2 167.002,107.717 168.4,108.573 C4_1.2 ; U1_1.2 170.013,106.319 ccw(c169.615,106.62) 170.038,106.886 168.93,108.654 C4_1.2 ; J1_1.2 169.017,109.227 C4_1.2
Vbat_2: C4_2.2 J1_2.2 R5_2.2 U1_2.2 | length 10.3
  Top Layer w0.6: R5_2.2 167.574,89.865 169.12,89.322 C4_2.2 ; U1_2.2 168.391,86.647 ccw(c168.373,87.147) 168.846,86.986 169.518,88.961 C4_2.2 ; J1_2.2 170.017,89.256 C4_2.2
Vbat_3: C4_3.2 J1_3.2 R5_3.2 U1_3.2 | length 10.3
  Top Layer w0.6: U1_3.2 152.403,74.881 ccw(c152.771,75.218) 152.956,74.754 154.894,75.526 C4_3.2 ; R5_3.2 154.32,77.591 154.911,76.062 C4_3.2 ; J1_3.2 155.443,75.337 C4_3.2
Vbat_4: C4_4.2 J1_4.2 R5_4.2 U1_4.2 | length 10.3
  Top Layer w0.6: U1_4.2 133.091,79.793 ccw(c133.587,79.732) 133.354,79.29 135.198,78.315 C4_4.2 ; J1_4.2 135.41,77.775 C4_4.2 ; R5_4.2 136.397,80.091 135.617,78.65 C4_4.2
Vbat_5: C4_5.2 J1_5.2 R5_5.2 U1_5.2 | length 10.4
  Top Layer w0.6: J1_5.2 124.503,94.626 C4_5.2 ; U1_5.2 124.575,97.702 ccw(c124.825,97.185) 124.261,97.076 124.671,94.954 C4_5.2 ; R5_5.2 126.941,95.233 125.181,94.911 C4_5.2
Vbat_6: C4_6.2 J1_6.2 R5_6.2 U1_6.2 | length 10.3
  Top Layer w0.6: J1_6.2 129.832,113.466 C4_6.2 ; R5_6.2 131.976,112.116 130.952,112.979 C4_6.2 ; U1_6.2 132.523,115.35 132.134,115.349 131.973,115.187 130.616,113.577 C4_6.2
VBUS: C1.2 IC1.4 P1.A4_B9 P1.B4_A9 R1.2 Rs.1 | length 6.4
  Top Layer w0.254: IC1.4 150.53,114.126 150.663,113.963 150.902,113.937 151.263,113.491 Rs.1
  Top Layer w0.4: P1.B4_A9@148.067,123.934 148.176,124.025 148.227,124.612 148.322,124.692 148.35,125.018 ; P1.A4_B9 152.757,123.607 152.81,124.211 152.73,124.306 152.779,124.865 152.918,124.981
VCC: IC1.3 Q1.3 Rs.2 SB1.1 | length 3.5
  Top Layer w0.254: Rs.2 149.39,113.655 149.836,114.016 149.965,114.003 150.129,114.135 IC1.3
Vcharger: C2.2 C5_1.2 C5_2.2 C5_3.2 C5_4.2 C5_5.2 C5_6.2 Q1.2 Ro.2 SB1.2 U1_1.6 U1_2.6 U1_3.6 U1_4.6 U1_5.6 U1_6.6 | length 3.1
  Top Layer w0.7: Q1.2@149.963,109.452 SB1.2@151.248,109.339 ; SB1.2 C2.2
VOUT: IC1.1 Ro.1 | length 3.9
  Top Layer w0.254: Ro.1 147.538,117.182 147.89,116.762 IC1.1
VSEL: IC1.8 Rv.2 | length 3.6
  Top Layer w0.254: IC1.8 152.955,118.979 153.091,118.817 153.011,117.904 153.477,117.348 Rv.2@154.509,117.257
pads on no net: IC1.6 P1. P1.A8 P1.B8

## Polygon pours and split planes (outlines as drawn)
Vcharger on Top Layer "VCHARGER_L01_P037" (solid, remove dead copper, pour order 37): 125.497,98.247 ccw(c148.247,98.247) 148.247,75.497 ccw(c148.247,98.247) 170.998,98.247 ccw(c148.247,98.247) 148.247,120.998 ccw(c148.247,98.247)
VBUS on Top Layer "VBUS_L01_P022" (solid, remove dead copper, pour order 22): 142.21,123.53 142.758,129.792 161.528,128.149 159.934,109.723 152.984,110.372 153.151,111.957 150.362,112.205 150.551,114.361 155.825,113.877 155.742,113.196 157.021,113.056 157.117,113.787 157.297,115.836 157.436,117.43 158.099,125.001 153.466,125.407 153.222,122.617 152.326,122.696 152.57,125.485 148.635,125.829 148.386,122.99
GND on Top Layer "GND_L01_P038" (solid, remove dead copper, pour order 38): 108.742,96.9 ccw(c148.5,96.9) 148.5,57.142 ccw(c148.5,96.9) 188.258,96.9 ccw(c148.5,96.9) 148.5,136.658 ccw(c148.5,96.9)
VCC on Top Layer "VCC_L01_P026" (solid, remove dead copper, pour order 26): 150.288,114.257 150.096,112.059 153.089,111.797 152.96,110.327 148.417,110.724 148.738,114.392
GND on Bottom Layer "GND_L02_P031" (solid, remove dead copper, pour order 31): 147.848,59.777 ccw(c147.848,97.877) 185.948,97.877 ccw(c147.848,97.877) 147.848,135.977 ccw(c147.848,97.877) 109.748,97.877 ccw(c147.848,97.877)

## Silkscreen, mask and mechanical layers (free items; w line width, h text height)
Top Overlay:
  text "MBC V1.3 / Designed by Ramanujan" at 137.674,97.332 h1 r355.03
Board Shape:
  the board outline again, w0.1

## Text inside footprints (layer, text, board x,y; h text height)
P1: Mechanical 13 "PCB EDGE" at 145.71,131.405 h0.8 r175